# Altium PCB USB_BITES.PcbDoc (part 2 of 2)
Units mm, origin at the board's own origin, x right, y up, seen from the top; angles counter-clockwise.
Board outline 51.5 x 42 mm, 4 copper layers (Top Layer, Layer 1, Layer 2, Bottom Layer), stack 0.603 mm thick; 64 components, 43 nets, 223 pads, 119 vias.
Unrouted connection lines stored in the file: 6.
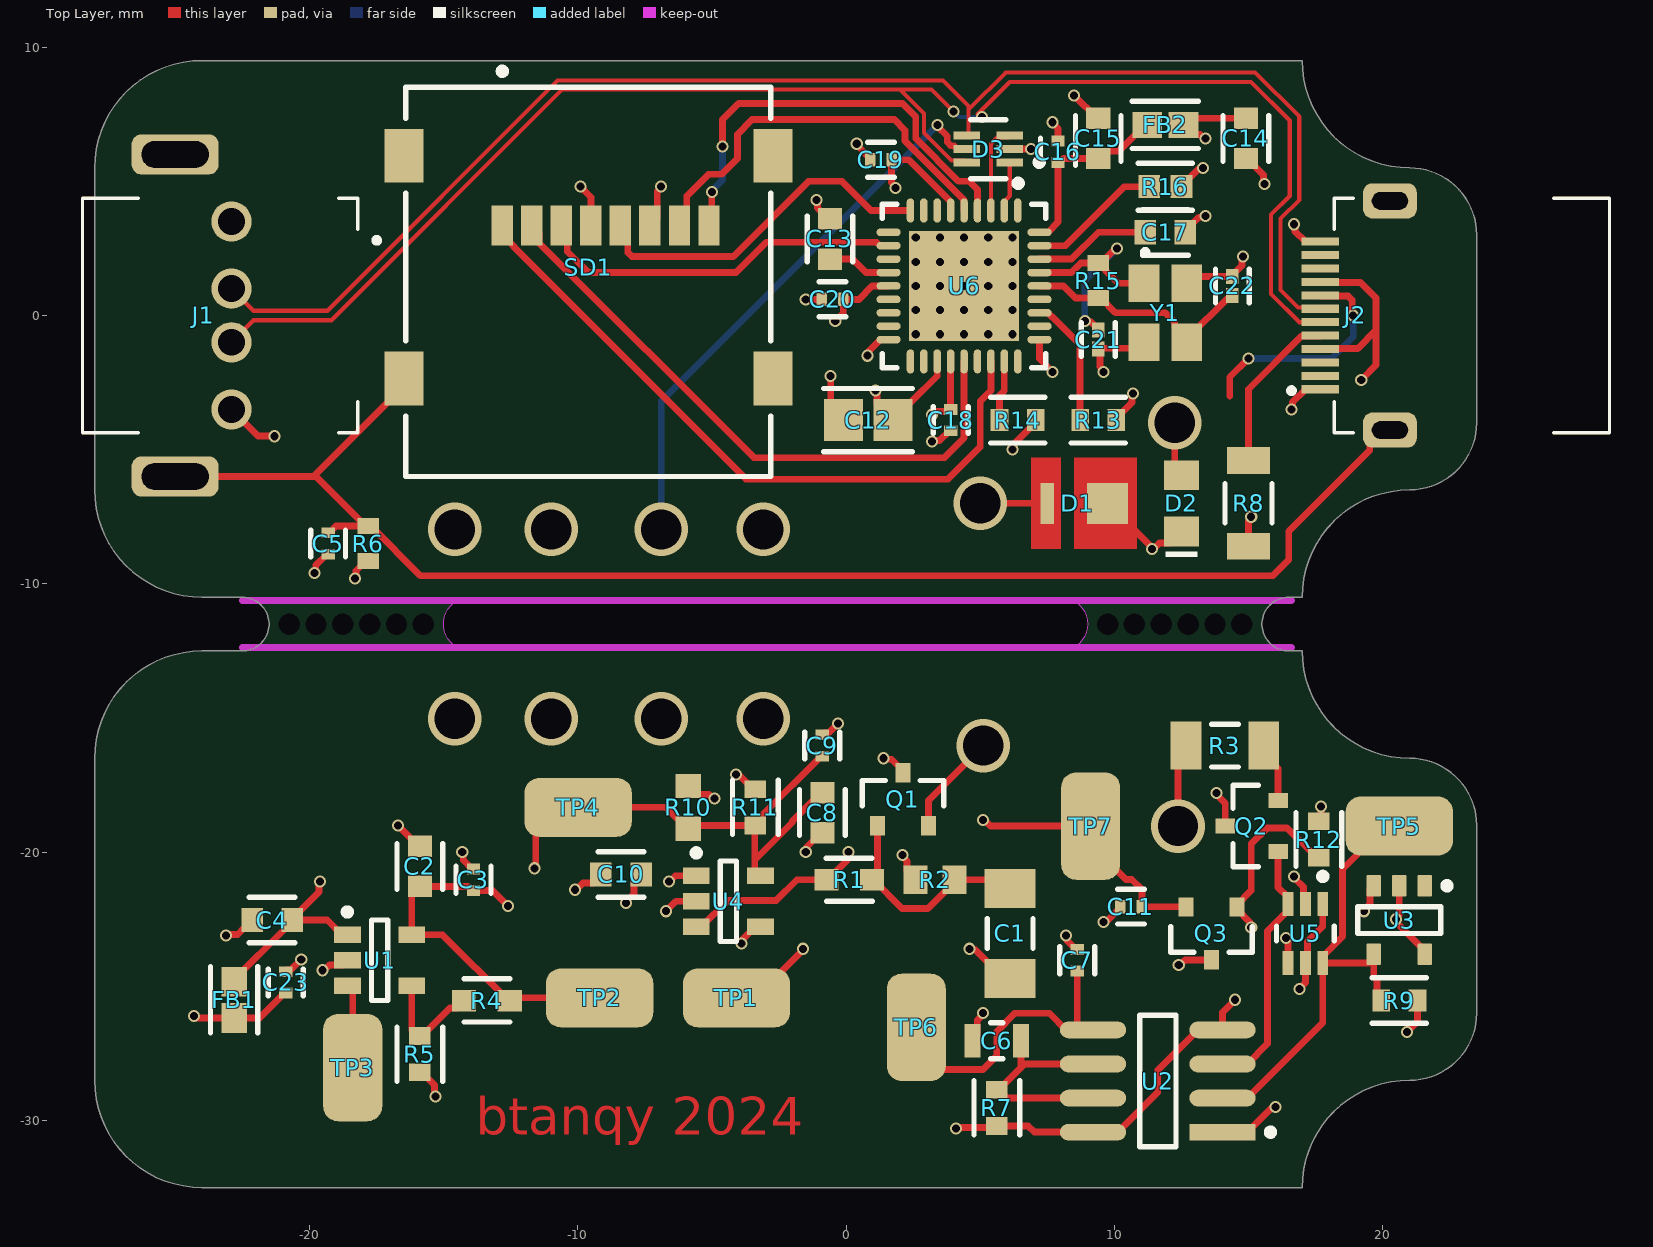
[diagram p0: Top Layer view]

## Polygon pours and split planes (outlines as drawn) (continued)
3V3 on Layer 2 "NONET_L-01_P-001" (solid, pour order 5): -23.982,-32.489 cw(c-23.982,-28.489) -27.982,-28.489 -27.982,-16.489 cw(c-23.982,-16.489) -23.982,-12.489 17.018,-12.489 ccw(c21.018,-12.489) 21.018,-16.489 cw(c21.018,-18.989) 23.518,-18.989 23.518,-25.989 cw(c21.018,-25.989) 21.018,-28.489 ccw(c21.018,-32.489) 17.018,-32.489
3V3 on Layer 2 "NONET_L-01_P-001" (solid, pour order 2): -23.982,-32.489 cw(c-23.982,-28.489) -27.982,-28.489 -27.982,-16.489 cw(c-23.982,-16.489) -23.982,-12.489 17.018,-12.489 ccw(c21.018,-12.489) 21.018,-16.489 cw(c21.018,-18.989) 23.518,-18.989 23.518,-25.989 cw(c21.018,-25.989) 21.018,-28.489 ccw(c21.018,-32.489) 17.018,-32.489
3V3 on Layer 2 "NONET_L-01_P-001" (solid, pour order 0): -24,9.5 ccw(c-24,5.5) -28,5.5 -28,-6.5 ccw(c-24,-6.5) -24,-10.5 17,-10.5 cw(c21,-10.5) 21,-6.5 ccw(c21,-4) 23.5,-4 23.5,3 ccw(c21,3) 21,5.5 cw(c21,9.5) 17,9.5
GND on Bottom Layer "NONET_L-01_P-001" (solid, pour order 7): -23.982,9.489 ccw(c-23.982,5.489) -27.982,5.489 -27.982,-6.511 ccw(c-23.982,-6.511) -23.982,-10.511 17.018,-10.511 cw(c21.018,-10.511) 21.018,-6.511 ccw(c21.018,-4.011) 23.518,-4.011 23.518,2.989 ccw(c21.018,2.989) 21.018,5.489 cw(c21.018,9.489) 17.018,9.489
GND on Bottom Layer "NONET_L-01_P-001" (solid, pour order 3): -23.982,-32.489 cw(c-23.982,-28.489) -27.982,-28.489 -27.982,-16.489 cw(c-23.982,-16.489) -23.982,-12.489 17.018,-12.489 ccw(c21.018,-12.489) 21.018,-16.489 cw(c21.018,-18.989) 23.518,-18.989 23.518,-25.989 cw(c21.018,-25.989) 21.018,-28.489 ccw(c21.018,-32.489) 17.018,-32.489

## Keep-outs
Keep-Out Layer:
  lines w0.254: -22.5,-12.375 16.6,-12.375 ; -22.5,-10.625 16.6,-10.625

## Other copper
Top Layer:
  pour cut-out: -14,-12.5 cw(c-14,-11.5) -14,-10.5 8,-10.5 cw(c8,-11.5) 9,-11.5 cw(c8,-11.5) 8,-12.5
  text "btanqy 2024" at -13.8,-30.533 h1.4

## Silkscreen, mask and mechanical layers (free items; w line width, h text height)
Mechanical 1:
  lines w0.254: -28,-28.5 ccw(c-24,-28.5) -24,-32.5 17,-32.5 cw(c21,-32.5) 21,-28.5 ccw(c21,-26) 23.5,-26 23.5,-19 ccw(c21,-19) 21,-16.5 cw(c21,-12.5) 17,-12.5 16.5,-12.5 cw(c16.5,-11.5) 16.5,-10.5 17,-10.5 cw(c21,-10.5) 21,-6.5 ccw(c21,-4) 23.5,-4 23.5,3 ccw(c21,3) 21,5.5 cw(c21,9.5) 17,9.5 -24,9.5 ccw(c-24,5.5) -28,5.5 -28,-6.5 ccw(c-24,-6.5) -24,-10.5 -22.5,-10.5 cw(c-22.5,-11.5) -22.5,-12.5 -24,-12.5 ccw(c-24,-16.5) -28,-16.5 -28,-28.5 ; -14,-12.5 cw(c-14,-11.5) -14,-10.5 8,-10.5 cw(c8,-11.5) 8,-12.5 -14,-12.5